# EAGLE board therm_bmp085 (EAGLE 8.1.0)
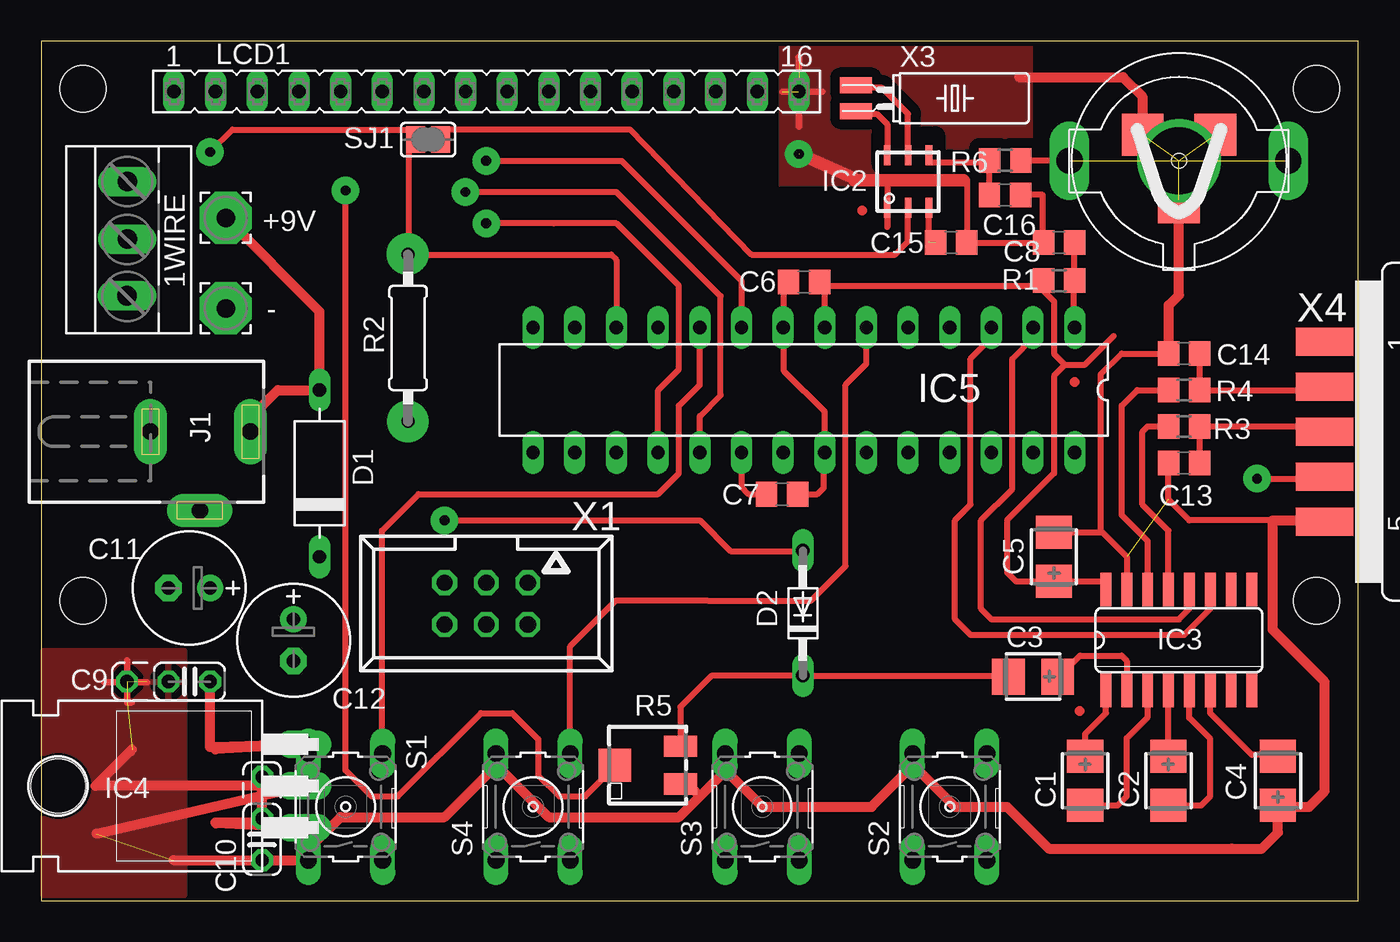
[diagram p0: board, top side]
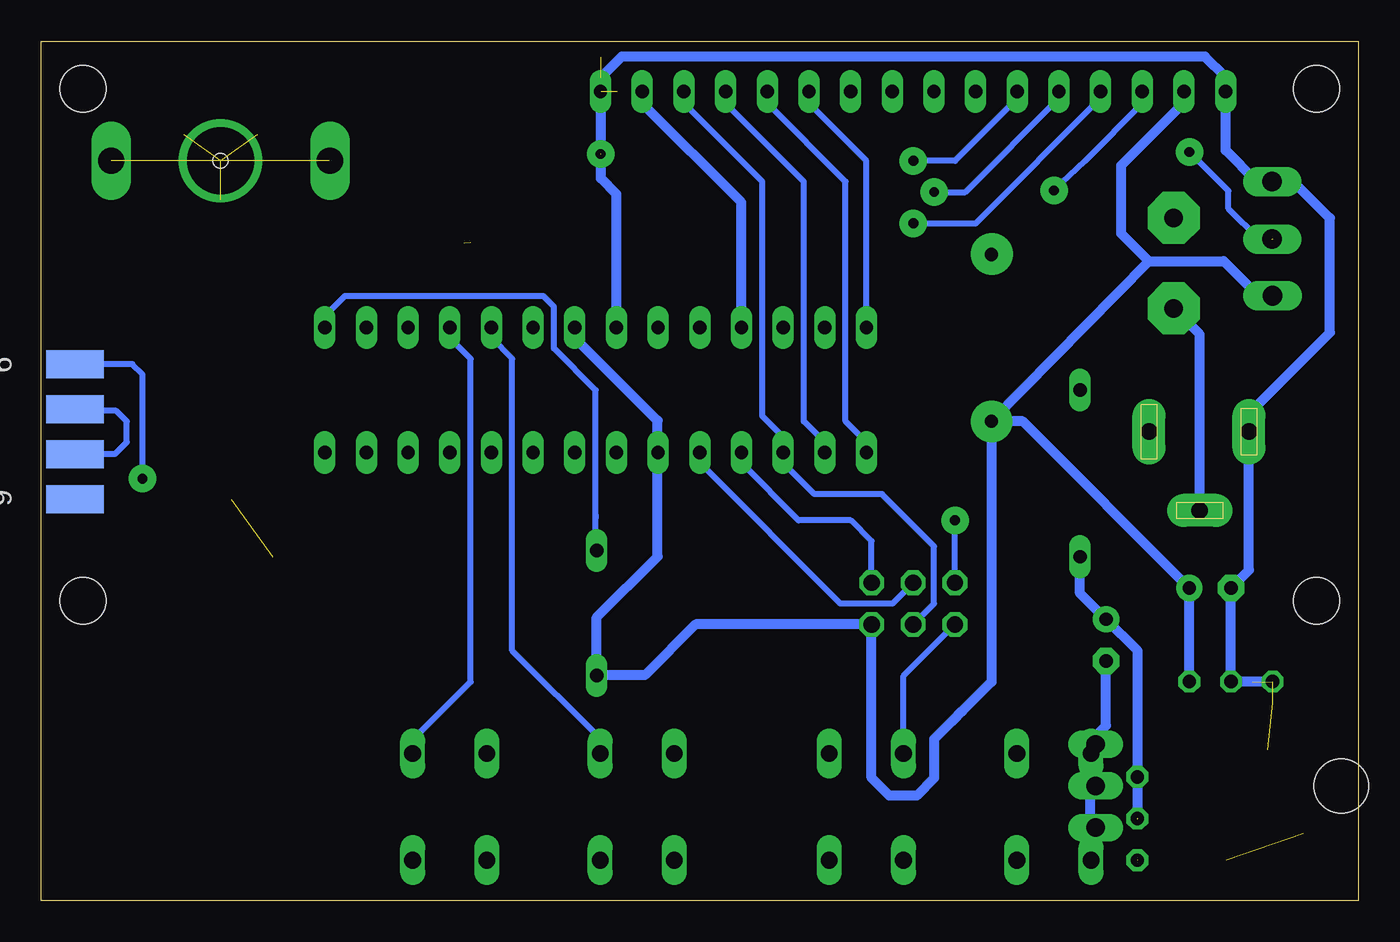
[diagram p1: board, bottom side, seen from below]

Size 80.31 x 52.38 mm. Coordinates in mm from the lower left corner, seen from the top.
Outline: 0,0 80.31,0 80.31,52.38 0,52.38 0,0
Copper layers (1*16): Top 0.035mm / dielectric 1.5mm / Bottom 0.035mm
Design rules "default": minimum track width 10mil, minimum drill 24mil, track to track 14mil, track to pad 14mil, pad to pad 14mil, via to via 14mil, smd to smd 14mil, copper to edge 0mil, drill to drill 14mil, minimum pad ring 10mil, minimum via ring 8mil, stop-mask expansion 4mil, vias tented up to drill 0mil, thermal gap 18mil
tRestrict: 5 lines

## Footprints (pad centres in the part's own frame; a part is rotated, then mirrored left to right if it is on the bottom)
KF350 = drill 1.194 long: 1 -3.463,0; 2 -0.007,-0.025; 3 3.499,-0.025
3,17/1,1 = drill 1.118 pad 3.175 octagon: 1 0,0
KEYELCO3001 = drill 1.6 pad 2.184 long: + -6.668,0; +1 6.668,0 | drill 4.064 pad 5.08: - 0,0 | smd 2.54 x 2.54: -1 0,2.54; -2 -2.223,-1.587; -3 2.223,-1.587 | hole 0.9: 0,0
CT3528 = smd 2 x 2.2: + 1.5,0; - -1.5,0
C0805 = smd 1.3 x 1.5: 1 -0.95,0; 2 0.95,0
C025_050-024X070 = drill 0.813 octagon: 1 -3.81,0; 2 -1.27,0; 3 1.27,0
E2,5-7 = drill 0.813 pad 1.6: + -1.27,0 | drill 0.813 pad 1.6 octagon: - 1.27,0
D-10 = drill 0.813 long: A 5.08,0; C -5.08,0
DO34-7 = drill 0.813 long: A 3.81,0; C -3.81,0
TSOC6 = smd 0.406 x 1.219: 1 -1.27,-1.6; 2 0,-1.6; 3 1.27,-1.6; 4 1.27,1.6; 5 0,1.6; 6 -1.27,1.6
SO16 = smd 0.66 x 2.032: 1 -4.445,-3.073; 2 -3.175,-3.073; 3 -1.905,-3.073; 4 -0.635,-3.073; 5 0.635,-3.073; 6 1.905,-3.073; 7 3.175,-3.073; 8 4.445,-3.073; 9 4.445,3.073; 10 3.175,3.073; 11 1.905,3.073; 12 0.635,3.073; 13 -0.635,3.073; 14 -1.905,3.073; 15 -3.175,3.073; 16 -4.445,3.073
TO220H = drill 1.118 long: 1 -2.54,-10.16; 2 0,-10.16; 3 2.54,-10.16 | hole 3.302: 0,4.826
DIL28-3 = drill 0.813 long: 1 -16.51,-3.81; 2 -13.97,-3.81; 3 -11.43,-3.81; 4 -8.89,-3.81; 5 -6.35,-3.81; 6 -3.81,-3.81; 7 -1.27,-3.81; 8 1.27,-3.81; 9 3.81,-3.81; 10 6.35,-3.81; 11 8.89,-3.81; 12 11.43,-3.81; 13 13.97,-3.81; 14 16.51,-3.81; 15 16.51,3.81; 16 13.97,3.81; 17 11.43,3.81; 18 8.89,3.81; 19 6.35,3.81; 20 3.81,3.81; 21 1.27,3.81; 22 -1.27,3.81; 23 -3.81,3.81; 24 -6.35,3.81; 25 -8.89,3.81; 26 -11.43,3.81; 27 -13.97,3.81; 28 -16.51,3.81
DCJ0202 = drill 1 pad 2 long: 1 0,3.1; 2 4.8,0; 3 0,-3
LCD16X2 = drill 0.813 long: 1 -32.055,16.916; 2 -29.515,16.916; 3 -26.975,16.916; 4 -24.435,16.916; 5 -21.895,16.916; 6 -19.355,16.916; 7 -16.815,16.916; 8 -14.275,16.916; 9 -11.735,16.916; 10 -9.195,16.916; 11 -6.655,16.916; 12 -4.115,16.916; 13 -1.575,16.916; 14 0.965,16.916; 15 3.505,16.916; 16 6.045,16.916 | hole 2.8: -37.606,-14.11; 37.594,-14.11; -37.606,17.09; 37.594,17.09
R0805 = smd 1.3 x 1.5: 1 -0.95,0; 2 0.95,0
0207/10 = drill 0.813 octagon: 1 -5.08,0; 2 5.08,0
RTRIM5X = smd 1.3 x 2: 1 -1.15,-2; 3 1.15,-2 | smd 2 x 2: 2 0,2
B3F-10XX = drill 1.016 long: 1 -3.251,2.261; 2 3.251,2.261; 3 -3.251,-2.261; 4 3.251,-2.261
SJ = smd 1.168 x 1.6: 1 -0.762,0; 2 0.762,0
IDC-6 = drill 1 octagon: 1 -2.54,-1.27; 2 -2.54,1.27; 3 0,-1.27; 4 0,1.27; 5 2.54,-1.27; 6 2.54,1.27
TC38H_SMD = smd 0.965 x 1.93: P$1 -0.797,-5.715; P$2 0.797,-5.715
F09D = smd 1.7 x 3.5: 1 -5.486,-6.045; 2 -2.743,-6.045; 3 0,-6.045; 4 2.743,-6.045; 5 5.486,-6.045 | smd 1.7 x 3.5 bottom: 6 -4.115,-6.045; 7 -1.372,-6.045; 8 1.372,-6.045; 9 4.115,-6.045

## Placement (x,y rotation side)
1WIRE  KF350  [KF350]  5.23,40.32 90 top
+9V  [3,17/1,1]  11.27,41.6 0 top
-  [3,17/1,1]  11.27,36.09 0 top
BAT1  3V-12MMBATT  [KEYELCO3001]  69.37,45.08 180 top
C1  1uF  [CT3528]  63.65,7.3 90 top
C2  1uF  [CT3528]  68.73,7.3 90 top
C3  1uF  [CT3528]  60.48,13.65 0 top
C4  1uF  [CT3528]  75.4,7.3 270 top
C5  1uF  [CT3528]  61.75,20.95 270 top
C6  100nF  [C0805]  46.51,37.7 180 top
C7  100nF  [C0805]  45.17,24.76 0 top
C8  100nF  [C0805]  62.07,40.09 180 top
C9  100nF  [C025_050-024X070]  9.05,13.34 0 top
C10  100nF  [C025_050-024X070]  13.48,3.73 270 top
C11  100uF  [E2,5-7]  9.04,19.05 180 top
C12  100uF  [E2,5-7]  15.39,15.87 270 top
C13  1n2F  [C0805]  69.68,26.67 180 top
C14  1n2F  [C0805]  69.68,33.33 180 top
C15  100nF  [C0805]  55.49,40.1 0 top
C16  100nF  [C0805]  58.76,43 180 top
D1  1N4007  [D-10]  16.98,26.03 90 top
D2  1N4148  [DO34-7]  46.44,17.52 90 top
IC2  DS2415P  [TSOC6]  52.86,43.81 0 top
IC3  MAX232SE  [SO16]  69.37,15.87 0 top
IC4  7805T_H  [TO220H]  5.87,6.98 90 top
IC5  ATMEGA48/88/168-PU  [DIL28-3]  46.51,31.11 180 top
J1  9-12V DC CP  [DCJ0202]  9.68,28.57 270 top
LCD1  LCD16X2BRD  [LCD16X2]  40.16,32.38 0 top
R1  10K  [R0805]  62.06,37.78 0 top
R2  [0207/10]  22.38,34.28 90 top
R3  470R  [R0805]  69.68,28.89 180 top
R4  470R  [R0805]  69.68,31.11 180 top
R5  10K  [RTRIM5X]  36.98,8.25 90 top
R6  10K  [R0805]  58.78,45.1 0 top
S1  MODE  [B3F-10XX]  18.57,5.71 90 top
S2  UP  [B3F-10XX]  55.4,5.71 90 top
S3  DOWN  [B3F-10XX]  43.97,5.71 90 top
S4  SELECT  [B3F-10XX]  30,5.71 90 top
SJ1  [SJ]  23.59,46.37 0 top
X1  ISP6IDC  [IDC-6]  27.14,18.09 180 top
X3  32K768  [TC38H_SMD]  55.4,48.89 270 top
X4  RS232  [F09D]  84.29,28.57 270 top

## Library data of the parts
1WIRE BAT1 IC2 LCD1 X1 X3 = blough
+9V - = wirepad
C1-C16 R1-R6 = rcl
D1 D2 = diode
IC3 = maxim
IC4 = linear
IC5 = atmega8
J1 = con-jack
S1-S4 = switch-omron; MPN: B3F-1000; OC_FARNELL: 176432; OC_NEWARK: 36M3542
SJ1 = jumper
X4 = con-subd

## Nets
+9V: +9V.1 D1.A J1.1
GND: 1WIRE.3 BAT1.- BAT1.-1 BAT1.-2 BAT1.-3 C4.+ C5.- C6.2 C7.2 C8.2 C9.2 C10.3 C11.- C12.- C13.2 C14.2 C15.2 C16.1 IC2.1 IC3.15 IC4.2 IC5.8 IC5.22 J1.3 LCD1.1 LCD1.16 R5.1 S1.1 S2.2 S3.2 S4.2 X1.6 X4.5
N$2: C10.2 C12.+ D1.C IC4.1
N$3: C3.+ IC3.2
N$4: C4.- IC3.6
N$5: IC3.12 IC5.2
N$6: IC3.11 IC5.3
N$7: C14.1 R4.1 X4.2
N$8: IC3.14 R4.2
N$9: C13.1 R3.1 X4.3
N$10: IC3.13 R3.2
N$11: X4.7 X4.8
N$12: X4.4 X4.6
N$13: C1.+ IC3.1
N$14: C1.- IC3.3
N$15: C2.- IC3.5
N$16: C2.+ IC3.4
N$18: LCD1.3 R5.2
N$19: IC5.10 S1.4
N$20: IC5.9 LCD1.6
N$21: IC5.19 LCD1.5 X1.3
N$22: IC5.18 LCD1.4 X1.1
N$23: IC5.17 LCD1.14 X1.4
N$24: IC5.16 LCD1.13
N$25: IC5.15 LCD1.12
N$26: IC5.14 LCD1.11
N$27: IC5.11 LCD1.15
N$28: IC5.4 S2.4
N$29: IC5.5 S3.4
N$30: IC5.6 S4.4
N$31: 1WIRE.2 IC5.12 R2.2 SJ1.1
N$32: IC2.6 X3.P$2
N$33: IC2.5 X3.P$1
N$35: C8.1 D2.A IC5.1 R1.2 X1.5
N$37: -.1 J1.2
N$38: IC2.2 SJ1.2
N$40: C15.1 IC2.3
N$41: BAT1.+ BAT1.+1 R6.2
VBAT: C16.2 IC2.4 R6.1
VCC: 1WIRE.1 C3.- C5.+ C6.1 C7.1 C9.3 C11.+ D2.C IC3.16 IC4.3 IC5.7 IC5.20 LCD1.2 R1.1 R2.1 R5.3 X1.2

## Tracks (layer width: path | path; a pad name or v marks a point on that pad's centre or on a via)
+9V
  Top 0.61: J1.1 12.78,29.45 14.44,31.11 D1.A 16.98,35.89 +9V.1
GND  (via drill 0.6 pad 1.68)  (13 unrouted)
  Top 0.356: C13.2 68.73,24.44 70,23.17 75.08,23.17 | X4.5 78.56,23.16 78.57,23.17 78.26,23.17 | C5.- 64.69,22.45 66.19,20.95 | 66.19,18.73 IC3.15 66.19,20.95 | 66.19,20.95 64.6,22.54 64.6,32.06 65.88,33.33 C14.2 | 39.4,7.1 R5.1 | 45.24,34.98 45.17,35.05 | 45.24,34.98 IC5.8 45.3,34.92 | 45.3,34.92 45.3,32.25 47.78,29.78 IC5.22 47.78,27.24 47.84,27.17 47.71,27.05 47.71,25.14 47.33,24.76 C7.2 | 45.3,34.92 45.24,34.98 | 45.3,34.92 45.3,37.14 C6.2 45.68,37.46 45.3,37.84 | IC2.1 51.59,41.15 51.59,41.04 51.59,43.98 | 5.25,12.05 5.55,12.06 | C15.2 56.4,40.1 | C15.2 | C15.2 C8.2 61.07,40.09 61.07,43 C16.1 | 56.15,43.97 | 56.24,43.9 56.15,43.97 | C15.2 56.44,43.97 56.15,43.97 | 49.59,43.9 49.59,43.98 51.59,43.98 | 51.59,43.98 51.59,44.02
  Top 0.406: 5.25,12.05 5.26,14.63 | 3.85,13.31 6.47,13.31 | 68.75,36.28 68.72,36.31 68.69,36.29 | 45.2,49.29 47.63,49.29 | 46.19,51.4 46.2,51.39 46.2,47.15
  Top 0.61: 3.37,4.08 IC4.2 3.33,6.98 5.45,9.1 | 75.4,5.71 C4.+ | 75.4,5.71 77.3,5.71 78.26,6.66 78.26,13.33 75.08,16.51 75.08,23.17 78.26,23.17 | 53.14,8.92 53.18,8.88 53.18,8.25 55.72,5.71 58.89,5.71 61.43,3.17 72.58,3.17 74.43,3.17 75.4,4.14 75.4,5.71 | 53.14,8.92 S2.2 | 53.14,8.92 53.14,8.21 50.63,5.71 43.97,5.71 41.71,7.97 S3.2 41.71,8.92 41.74,8.88 41.74,7.93 40.16,6.34 | 16.35,2.54 16.31,2.5 S1.1 16.35,2.5 16.35,2.54 | 16.35,2.54 16.66,2.85 16.66,3.49 18.25,5.08 24.6,5.08 27.74,8.21 S4.2 27.74,8.92 27.78,8.88 27.78,8.25 30.95,5.08 38.89,5.08 40.16,6.34 | 5.45,9.1 5.55,9.2 | 40.16,6.34 39.4,7.1 | C15.2 56.46,40.1 56.47,40.08 56.48,40.09 | 16.35,2.54 16.26,2.45 C10.3 | 5.45,9.1 | 67.17,46.84 67.14,46.81 BAT1.-3 67.14,46.83 67.14,46.84 67.14,49 65.96,50.18 59.62,50.18 | 69.46,42.44 69.37,42.53 BAT1.-1 | C14.2 68.73,33.36 68.75,33.37 68.75,36.28 69.36,36.9 BAT1.-1 | 71.62,46.62 71.59,46.65 BAT1.-2 | BAT1.-1 69.36,42.69 | 8.07,2.47 C10.3
  Top 0.762: v46.2,45.49 49.5,44.03 49.59,43.9 56.24,43.9
  Bottom 0.356: S4.2 27.74,9.8 27.74,13.69 X1.6 | 46.19,49.21 46.19,49.28 LCD1.16 | 5.87,43.82 5.87,43.81 5.23,43.81
  Bottom 0.61: 8.1,47.3 8.1,47 8.09,46.98 8.09,45.71 6.19,43.82 5.87,43.82 5.54,43.82 | 8.1,47.3 LCD1.1 8.1,49.51 8.09,49.52 8.09,50.16 9.36,51.43 44.92,51.43 46.2,50.15 LCD1.16 v46.2,45.49 | 8.1,47.3 8.09,47.3 | 5.54,43.82 5.55,43.81 | 5.54,43.82 1WIRE.3 | S1.1 16.31,2.5 16.35,2.54 16.35,8.87 | 5.23,43.81 3.96,43.81 1.74,41.59 1.74,34.6 6.5,29.84 6.5,28.89 6.82,28.57 J1.3 6.68,20.14 C11.- 7.77,13.37 7.79,13.35 C9.2 7.8,13.34 | 5.27,13.32 7.82,13.32 | 7.82,13.32 7.83,13.31 | IC5.8 45.24,43.05 46.19,44 46.19,45.49 v46.2,45.49 | 7.8,13.34 | 7.82,13.32 7.8,13.32 7.8,13.34 | C12.- 15.39,10.66 16.32,9.73 16.32,8.88 16.34,8.87 16.35,8.87 | 16.35,8.87 16.35,8.88
  pour Top (isolate 0.356): 0.15,15.23 8.73,15.23 8.73,0.31 0.15,0.31
  pour Top (isolate 0.61, no thermals): 44.98,52.06 60.47,52.06 60.47,44.28 50.56,44.27 50.57,43.52 44.98,43.52
N$2  (2 unrouted)
  Top 0.61: 10.67,4.72 10.63,4.76 | 10.67,4.72 IC4.1 10.66,4.7 | 10.67,4.72 10.71,4.76 13.5,4.76 13.5,5 | 13.5,5 13.5,4.99 | 13.5,5 13.5,7.56
  Bottom 0.61: 16.98,20.32 D1.C | 13.47,5.01 13.47,13.94 13.46,13.94 | 13.46,13.94 13.46,13.93 | 13.46,13.94 13.46,15.21 C12.+ 16.98,18.72 D1.C | D1.C 16.98,20.99
N$3
  Top 0.356: IC3.2 66.19,14.6 65.88,14.92 63.34,14.92 62.06,13.65 C3.+
N$4
  Top 0.356: C4.- 75.4,8.88 73.82,8.88 71.27,11.42 IC3.6
N$5
  Top 0.356: IC3.12 70,17.78 69.37,17.14 57.94,17.14 57.3,17.78 57.3,23.17 59.21,25.08 59.21,33.02 60.48,34.28 IC5.2
N$6
  Top 0.356: IC3.11 71.27,17.78 69.68,16.19 56.67,16.19 55.72,17.14 55.72,23.17 56.67,24.12 56.67,33.02 57.94,34.28 IC5.3
N$7
  Top 0.356: C14.1 R4.1 78.26,31.11 78.56,31.42 | 78.56,31.42 78.57,31.43 | 78.56,31.42 X4.2
N$8
  Top 0.356: IC3.14 67.46,21.9 65.88,23.49 65.88,30.16 66.83,31.11 R4.2 69.05,31.11
N$9
  Top 0.356: C13.1 R3.1 78.26,28.89 78.57,28.57 X4.3
N$10
  Top 0.356: IC3.13 68.73,22.54 67.14,24.12 67.14,28.57 67.46,28.89 R3.2
N$11
  Bottom 0.356: X4.8 75.82,27.2 75.08,27.94 75.08,29.21 75.72,29.84 78.57,29.84 78.56,29.85 X4.7
N$12  (via drill 0.6 pad 1.68)
  Top 0.356: X4.4 78.56,25.73 78.57,25.71 v74.13,25.71
  Bottom 0.356: X4.6 74.75,32.68 74.13,32.06 v74.13,25.71
N$13
  Top 0.356: IC3.1 64.92,11.42 63.65,10.15 C1.+
N$14
  Top 0.356: C1.- 65.64,5.8 66.19,6.34 66.19,9.9 67.46,11.17 IC3.3 67.46,13.01
N$15
  Top 0.356: C2.- 70.72,5.8 71.27,6.34 71.27,9.86 70,11.13 IC3.5
N$16
  Top 0.356: 68.73,8.57 C2.+ IC3.4
N$17  (via drill 0.6 pad 2.54)
  other vias: 22.35,39.41
N$18  (via drill 0.6 pad 1.68)
  Top 0.356: R5.2 34.98,7.84 34.66,7.84 33.17,6.34 31.59,6.34 30.32,7.62 30.32,9.84 28.73,11.42 26.82,11.42 21.74,6.34 20.16,6.34 18.57,7.93 18.57,38.09 v18.57,43.27
  Bottom 0.356: v18.57,43.27 16.66,45.08 13.17,48.57 13.17,49.21 13.18,49.22 LCD1.3
N$19
  Top 0.356: S1.4 20.83,9.16 20.79,9.2 20.79,22.54 23.01,24.76 37.62,24.76 38.89,26.03 38.89,30.16 40.16,31.43 IC5.10
N$20  (via drill 0.6 pad 1.68)
  Top 0.356: v27.14,45.08 35.4,45.08 42.7,37.78 IC5.9 42.7,34.6
  Bottom 0.356: LCD1.6 20.8,48.88 24.6,45.08 v27.14,45.08
N$21  (via drill 0.6 pad 1.68)
  Top 0.356: IC5.19 40.16,29.52 41.43,30.79 41.43,36.82 35.08,43.17 v25.87,43.17
  Bottom 0.356: IC5.19 40.16,26.67 31.59,18.09 28.41,18.09 X1.3 | LCD1.5 18.26,48.88 23.96,43.17 v25.87,43.17
N$22  (via drill 0.6 pad 1.68)
  Top 0.356: v27.14,41.27 31.27,41.27 35.08,41.27 38.89,37.46 38.89,32.38 37.62,31.11 IC5.18 37.62,27.94
  Bottom 0.356: LCD1.4 15.72,48.88 23.33,41.27 v27.14,41.27 | X1.1 29.68,21.9 30.95,23.17 34.12,23.17 37.62,26.67 IC5.18
N$23
  Bottom 0.356: LCD1.14 41.12,48.59 36.35,43.81 36.35,29.52 35.08,28.25 35.08,27.62 35.4,27.3 IC5.17 35.08,26.67 33.17,24.76 29.05,24.76 25.87,21.59 25.87,18.09 X1.4
N$24
  Bottom 0.356: LCD1.13 38.58,48.59 33.81,43.81 33.81,29.21 32.54,27.94 IC5.16
N$25
  Bottom 0.356: LCD1.12 36.04,48.59 31.27,43.81 31.27,29.21 30,27.94 IC5.15
N$26
  Bottom 0.356: LCD1.11 33.5,48.59 30,45.08 IC5.14
N$27
  Bottom 0.61: LCD1.15 43.66,48.59 37.62,42.54 IC5.11
N$28
  Bottom 0.356: IC5.4 55.4,34.28 54.13,33.02 54.13,13.33 57.62,9.84 57.62,8.88 57.66,8.92 S2.4
N$29
  Bottom 0.356: IC5.5 52.86,34.28 51.59,33.02 51.59,15.23 46.19,9.84 46.19,8.88 46.23,8.92 S3.4
N$30
  Top 0.356: IC5.6 50.32,32.7 49.05,31.43 49.05,20.38 46.95,18.28 40.63,18.28 40.62,18.29 35.06,18.29 32.26,15.49 S4.4
N$31  (via drill 0.6 pad 1.68)  (2 unrouted)
  Top 0.356: IC5.12 35.08,35.55 | IC5.12 35.08,34.6 | IC5.12 35.08,39.05 34.76,39.36 R2.2 22.41,39.36 | v10.31,45.62 11.68,46.98 22.41,46.98 | 22.41,39.36 22.41,39.22 | 22.41,46.98 SJ1.1 | 22.41,46.98 22.41,39.36 | 22.41,46.98 22.7,46.98
  Bottom 0.356: 5.23,40.32 6.09,40.32 7.93,42.16 7.93,43.24 v10.31,45.62
N$32
  Top 0.356: IC2.6 51.59,47.3 50.95,47.94 49.68,47.94 49.53,48.09 | 49.53,48.09 49.37,48.25 | X3.P$2 49.53,48.09
N$33
  Top 0.356: IC2.5 52.86,47.94 51.27,49.52 49.68,49.52 X3.P$1
N$35  (via drill 0.6 pad 1.68)
  Top 0.356: IC5.1 62.95,34.92 62.95,37.72 R1.2 | R1.2 | R1.2 | R1.2 63.01,37.79 C8.1 62.97,40.09 | R1.2 62.96,37.73 63.46,37.24 | 46.43,21.29 46.44,21.3 D2.A 46.45,21.29 42.04,21.29 40.16,23.17 v24.6,23.17 | 62.97,40.09 62.98,40.09 C8.1 | 62.97,40.09 62.96,40.08
  Bottom 0.356: X1.5 v24.6,23.17 | 46.51,23.49 46.51,23.3 | 46.51,23.49 46.51,31.11 49.05,33.65 49.05,36.19 49.68,36.82 | 46.51,23.49 46.51,22.28 D2.A | IC5.1 62.95,34.92 | 49.68,36.82 49.69,36.82 | IC5.1 63.03,34.89 | IC5.1 | IC5.1 63,34.93 | 49.68,36.82 61.79,36.82 | 61.79,36.82 63.02,35.59 63.02,34.97 63.03,34.96 63.02,34.94 IC5.1 | 61.79,36.82 61.79,36.83 | 61.79,36.82
N$36  (via drill 0.6 pad 2.54)
  other vias: 22.37,29.19
N$37
  Bottom 0.61: J1.2 9.68,34.5 -.1
N$38
  Top 0.356: IC2.2 52.86,42.19 | 52.86,42.19 | 52.86,42.19 52.87,42.19 | SJ1.2 24.36,46.71 24.64,46.99 35.9,46.99 43.31,39.36 52.06,39.36 52.86,40.16 52.86,42.19 IC2.2 | IC2.2 52.82,42.21
N$40  (1 unrouted)
  Top 0.356: 54.14,42.22 IC2.3 54.13,40.11 | C15.1 54.54,40.11
N$41  (1 unrouted)
  Top 0.356: 62.76,45.1 62.76,45.08 BAT1.+1 | R6.2 62.76,45.1 | 62.76,45.1 62.76,45.15
VBAT
  Top 0.356: C16.2 57.8,43 57.8,45.1 R6.1 57.48,45.1 57.48,45.24 57.54,45.24 57.62,44.98 54.09,44.98 | 54.09,44.98 IC2.4 | 54.09,44.98 54.11,45.44
VCC
  Top 0.356: IC3.16 64.92,19.36 64.83,19.45 C5.+ 59.44,19.45 58.89,20 58.89,23.17 61.75,26.03 61.75,31.97 62.43,32.65 | IC5.7 47.78,37.27 47.59,37.46 C6.1 47.46,37.46 60.84,37.46 61.12,37.74 R1.1 | IC5.20 42.76,27.3 42.7,27.24 42.7,25.2 43.14,24.76 C7.1 | R1.1 60.73,37.78 60.67,37.84 | 60.92,37.33 61.75,36.51 61.75,33.31 62.41,32.65 62.43,32.65 | R1.1 60.92,37.59 60.92,37.33 | 60.92,37.33 60.78,37.47 | 60.79,37.45 60.79,37.46 R1.1 | 65.38,34.4 63.64,32.65 62.43,32.65 | C3.- 59.2,13.65 arc-90 59.21,13.63 arc90 59.13,13.71 D2.C 46.45,13.69 40.87,13.69 38.98,11.8 R5.3
  Top 0.61: 10.63,9.2 10.63,9.22 IC4.3 10.59,9.34 10.31,9.34 C9.3
  Bottom 0.356: 47.83,34.86 47.83,34.92 IC5.7 47.78,34.89 47.83,34.94
  Bottom 0.61: IC5.7 47.78,34.28 42.73,29.24 42.73,27.29 | R2.1 22.38,13.33 | 6.13,36.85 1WIRE.1 | 6.13,36.85 6.21,36.85 6.21,36.98 6.24,36.98 | R2.1 20.47,29.21 C11.+ C9.3 | D2.C 46.44,14.51 | C9.3 | C9.3 | 22.38,13.33 22.37,13.33 | 22.38,13.33 24.18,11.53 24.16,11.53 24.16,11.52 24.73,10.96 | 22.39,29.21 R2.1 | 42.73,27.29 42.73,20.96 46.44,17.26 D2.C | D2.C | D2.C | 42.73,27.29 IC5.20 | 46.47,13.73 | 46.47,13.73 D2.C | 46.47,13.73 43.5,13.73 40.41,16.82 X1.2 29.68,7.48 28.6,6.4 26.93,6.4 25.88,7.45 25.88,9.83 24.74,10.96 24.73,10.96 | 24.73,10.96 | LCD1.2 10.64,48.61 14.46,44.8 14.46,40.64 12.78,38.96 | R2.1 12.78,38.96 | 6.13,36.85 6.13,36.87 8.22,38.96 12.78,38.96
(copper drawn outside any net)
  shapes: Top circle x3

## Text on the board
tTest: _ | SJ1 | + | 3V | 1 | +9V BAT | + | RS232 | 1-WIRE | PULLUP | 9-12V | ISP | CNT | MD | SL | DN | UP
bTest: MULTITHERM | REV: A | T.BLOUGH | 2007/12